# Altium PCB Multi_HUTSCHIENE_EXT_1_1.PcbDoc
Units mm, origin at the board's own origin, x right, y up, seen from the top; angles counter-clockwise.
Board outline 41.5 x 56.74 mm, 2 copper layers (Top Layer, Bottom Layer); 28 components, 23 nets, 95 pads, 21 vias.
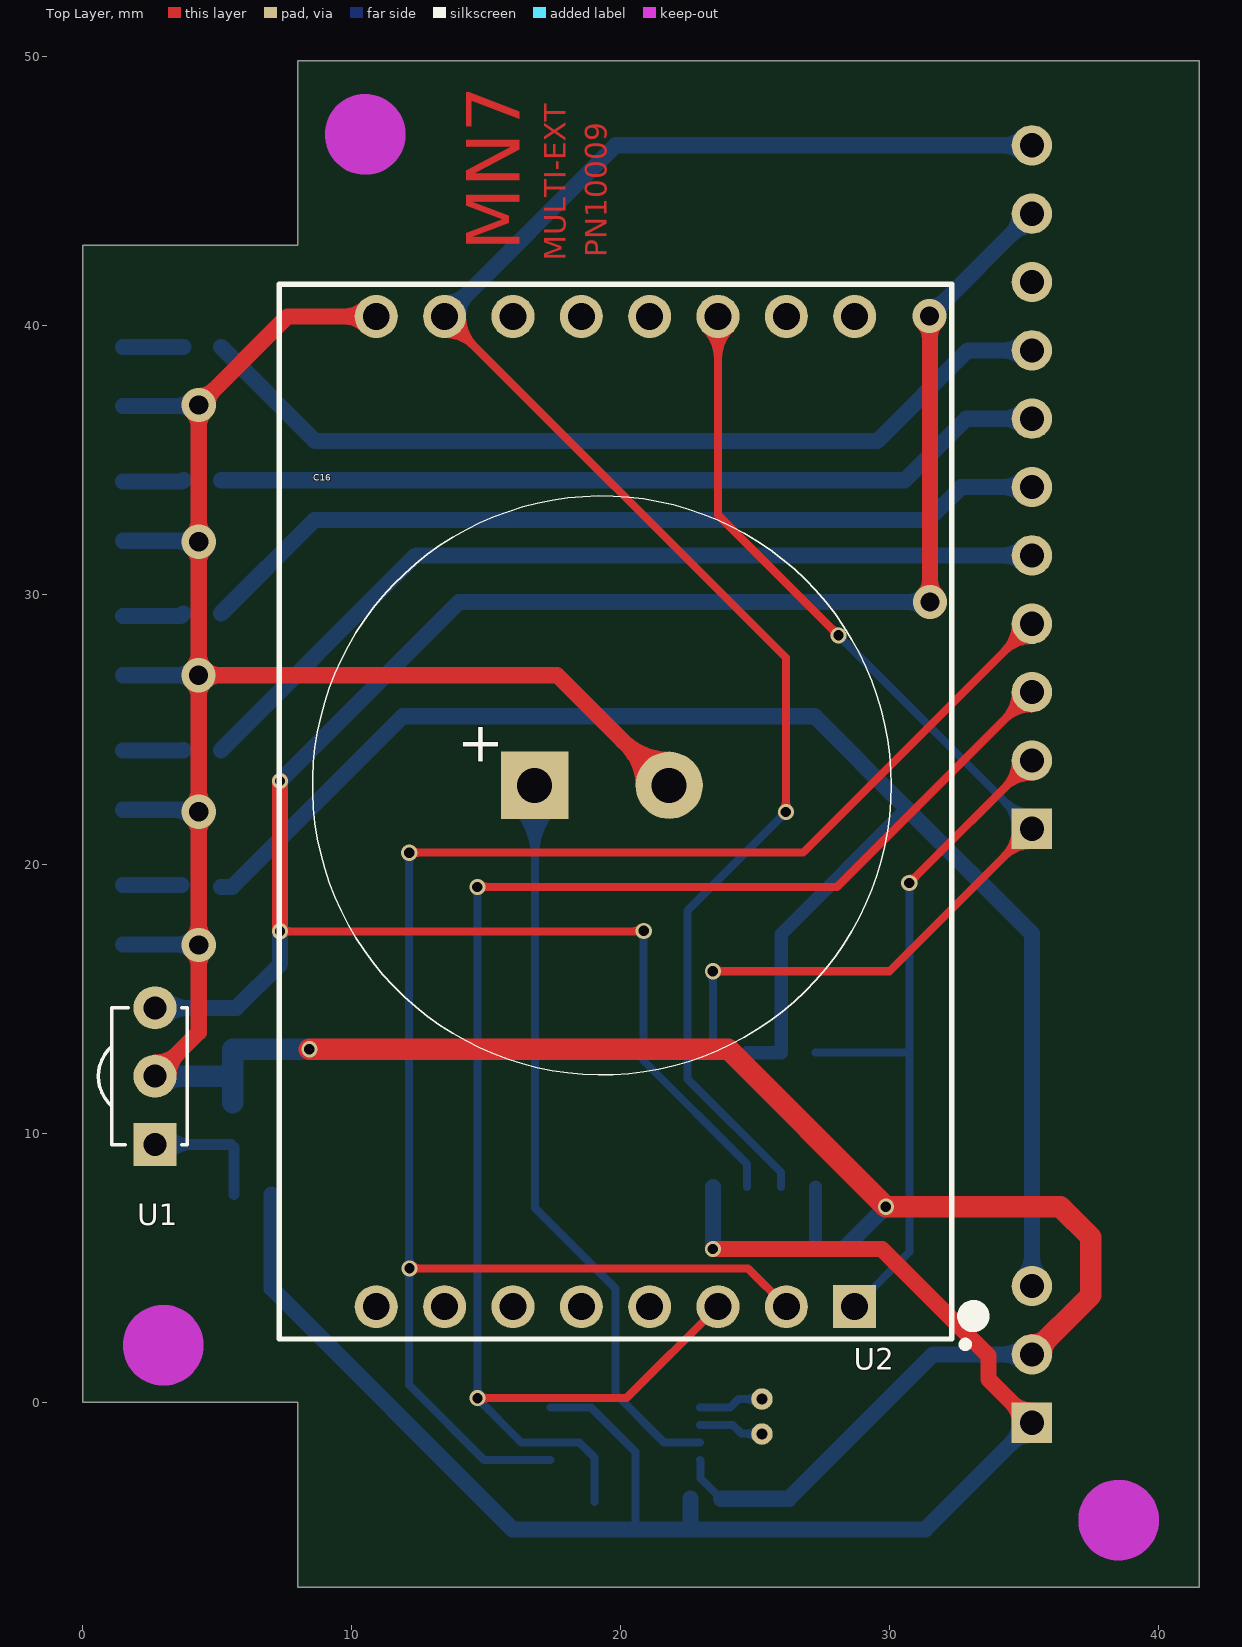
[diagram p0: Top Layer view]
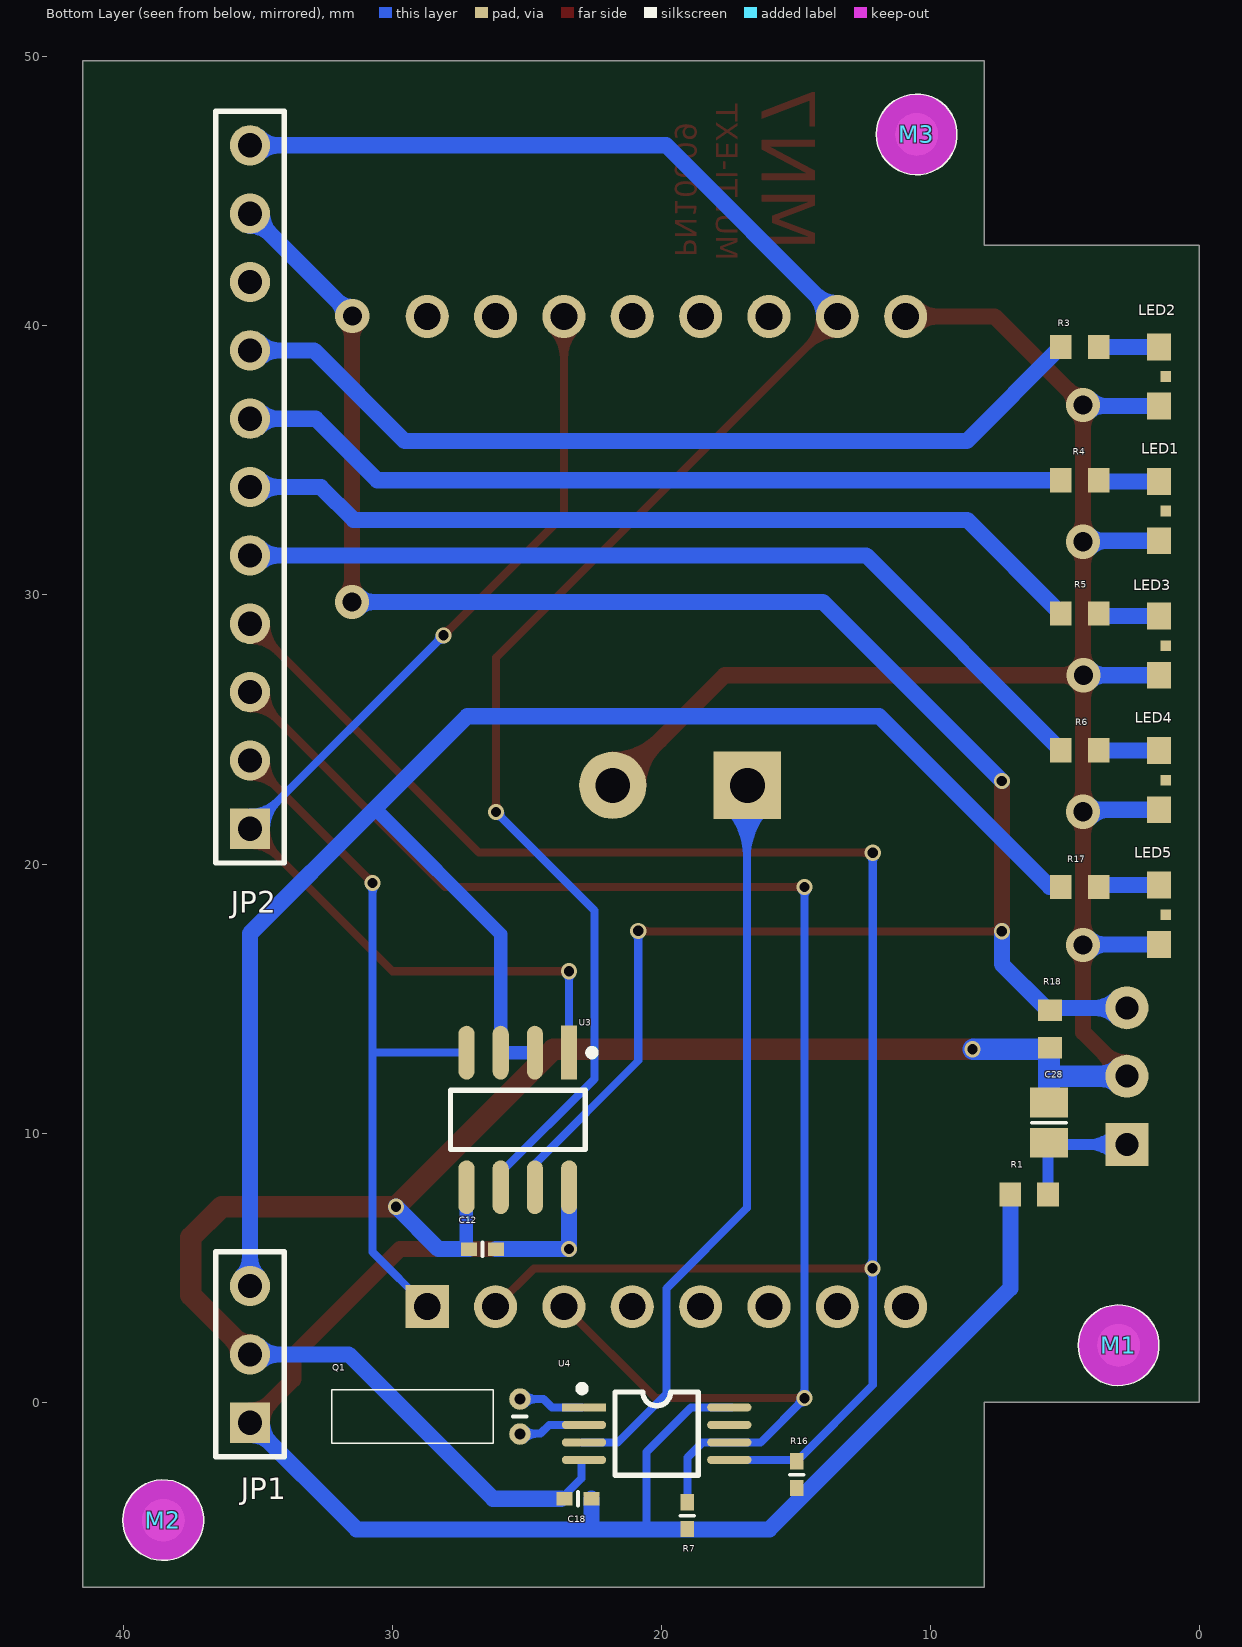
[diagram p1: Bottom Layer view, seen from below]

## Layer stack, top to bottom
Top Solder: solder mask 0.0102, Solder Resist, Dk 3.5
Top Layer: signal copper 0.0356
Dielectric 1: dielectric 0.32, FR-4, Dk 4.8
Bottom Layer: signal copper 0.0356
Bottom Solder: solder mask 0.0102, Solder Resist, Dk 3.5

## Board outline
0,0 0,43.002 8.001,43.002 8.001,49.86 41.504,49.86 41.504,-6.883 8.001,-6.883 8.001,0

## Design rules (kind name [scope] priority, off if disabled: settings)
Clearance [All] p1: gap=0.254
ComponentClearance ComponentClearance_1 [(HasFootprint('KIMaip') AND HasFootprint('Goldcap_B'))] p1: gap=0 collisioncheckmode=3 verticalgap=0 showdistances=FALSE
ComponentClearance [All] p2: gap=0 collisioncheckmode=3 verticalgap=0 showdistances=FALSE
MinimumSolderMaskSliver [All] p1: minsoldermaskwidth=0.127
PolygonConnect [All] p1: connectstyle=Relief reliefconductorwidth=0.254 reliefentries=4 polygonreliefangle="90 Angle" airgapwidth=0.254
RoomDefinition Multi_HUTSCHIENE_EXT_1_2 [InComponentClass('Multi_HUTSCHIENE_EXT_1_2')] p1: confinementstyle=ConfineIn formatcopy=TRUE lockcomponents=FALSE outline -3.025,-8.05 46.125,-8.05 46.125,51.918 -3.025,51.918
RoomDefinition Multi_HUTSCHIENE_EXT_1_1 [InComponentClass('Multi_HUTSCHIENE_EXT_1_1')] p2: confinementstyle=ConfineIn formatcopy=TRUE lockcomponents=FALSE outline -3.575,-8.05 44.275,-8.05 44.275,51.156 -3.575,51.156
RoutingVias [All] p1: holewidth=0.711 width=1.27 viastyle="Through Hole" minholewidth=0.25 minwidth=0.5 maxholewidth=0.711 maxwidth=1.27
SilkToBoardRegionClearance [(HasFootprint('Mark-3mm') AND IsEmbeddedBoard)] p1:
SilkToSilkClearance [All] p1: silktosilkclearance=0.2
SilkToSolderMaskClearance [IsPad] p1: minsilkscreentomaskgap=0.1 clearancetoexposedcopper=TRUE
SolderMaskExpansion [All] p1: expansion=0.102
UnpouredPolygon [All] p1: allowunpoured=FALSE
Width [All] p1: maxlimit=1 minlimit=0.254 preferedwidth=0.6
24 further rules are at their usual default settings.

## Classes and differential pairs
component class Multi_HUTSCHIENE_EXT_1_1: C28 JP1 JP2 LED1 LED2 LED3 LED4 LED5 M1 M2 M3 R1 R3 R4 R5 R6 R17 U1
component class Multi_HUTSCHIENE_EXT_1_2: C12 C16 C18 Q1 R7 R16 R18 U2 U3 U4

## Components (designator, comment, footprint, x,y, rotation, side; value= is the part's Value field where it differs from the comment)
C12 "100nF25V_0402" C0402 26.637,5.69 r0 bottom
C16 "1F5_5V5_POL" Goldcap_B 19.3,22.925 r0 top
C18 "100nF25V_0402" C0402 23.089,-3.581 r0 bottom
C28 "47u6V3_0805" C0805 5.588,10.389 r90 bottom
JP1 "Plug_3_90_2.54" HDR1X3-DOWN 35.281,1.778 r90 bottom
JP2 "Plug_11_90_2.54" HDR1X11_2.54-DOWN 35.281,34.011 r90 bottom
LED1 "HSMG-120-Y" HSMA-120-OR 1.5,33.117 r270 bottom
LED2 "HSMG-120-GR" HSMA-120-G 1.5,38.117 r270 bottom
LED3 "HSMG-120-Y" HSMA-120-OR 1.5,28.117 r270 bottom
LED4 "HSMG-120-Y" HSMA-120-OR 1.5,23.117 r270 bottom
LED5 "HSMG-120-Y" HSMA-120-OR 1.5,18.117 r270 bottom
M1 "Mark" Mark-3mm 3,2.117 r180 bottom
M2 "Mark" Mark-3mm 38.504,-4.383 r180 bottom
M3 "Mark" Mark-3mm 10.504,47.117 r180 bottom
Q1 "Crystal_32k768Hz" VT-200 25.248,-0.533 r180 bottom
R1 "47R_0603" R0603(1608) 6.325,7.722 r0 bottom
R3 "82R_0603" R0603(1608) 4.445,39.218 r0 bottom
R4 "82R_0603" R0603(1608) 4.445,34.265 r0 bottom
R5 "82R_0603" R0603(1608) 4.445,29.312 r0 bottom
R6 "82R_0603" R0603(1608) 4.445,24.232 r0 bottom
R7 "4k7_0402" R0402 19.025,-4.216 r90 bottom
R16 "4k7_0402" R0402 14.961,-2.692 r90 bottom
R17 "82R_0603" R0603(1608) 4.445,19.152 r0 bottom
R18 "0R_0603" R0603(1608) 5.554,13.867 r270 bottom
U1 "GP1UX301QS" IR-GP 2.692,12.117 r270 top
U2 "KIMaip" KIMaip 19.805,21.95 r90 top
U3 "ADM3483ARZ" SOIC8_N 25.329,10.492 r0 bottom
U4 "DS1339U-33" uSOP8 20.168,-1.168 r270 bottom

## Footprints (in the part's own frame and the unit in brackets; to place one, negate y for a bottom-side part, rotate by r counter-clockwise, add the part's x,y. Pads: shape width x height; smd on the part's side, far side on the other; paste and mask are expansions set on the pad)
C0402 [mm] "Chip Capacitor, Body 1.0x0.5mm, IPC High Density"
  rect 0.6x0.5 smd: 1(-0.5,0) 2(0.5,0)
  silkscreen extent 0,-0.25 0,0.25, body extent -0.55,-0.3 0.55,0.3, height 0.5
C0805 [mm] "Chip Capacitor, Body 2.0x1.3mm, IPC High Density"
  rect 1.1x1.4 smd: 1(-0.75,0) 2(0.75,0)
  silkscreen extent 0,-0.64 0,0.64, body extent -1.1,-0.72 1.1,0.72, height 1.4
Goldcap_B [mm] "Capacitor, Body 21.5x9.5mm, IPC High Density"
  rect 2.5x2.5 hole 1.3: 1(-2.5,0)
  round 2.5 hole 1.3: 2(2.5,0)
  silkscreen extent -10.75,-10.76 10.76,10.76, body extent -10.67,-10.73 10.75,10.73, height 8
HDR1X3-DOWN [mm] "Connector; Header; 3 Position"
  rect 1.5x1.5 hole 0.9: 1(-2.54,0)
  round 1.5 hole 0.9: 2(0,0) 3(2.54,0)
  silkscreen extent -3.81,-1.27 3.81,1.27, body extent -3.81,-0.31 3.81,10.05, height 2.57
HDR1X11_2.54-DOWN [mm] "Connector; Header; 11 Position"
  rect 1.5x1.5 hole 0.9: 1(-12.7,0)
  round 1.5 hole 0.9: 2(-10.16,0) 3(-7.62,0) 4(-5.08,0) 5(-2.54,0) 6(0,0) 7(2.54,0) 8(5.08,0) 9(7.62,0) 10(10.16,0) 11(12.7,0)
  silkscreen extent -13.97,-1.27 13.97,1.27, body extent -13.97,-0.33 13.96,10.04, height 2.57
HSMA-120-G [mm] "GREEN"
  rect 1x0.9 smd: 1(1.1,0) 2(-1.1,0)
  rect 0.4x0.4 smd: 3(0,0.25)
  body extent -0.8,-0.2 0.8,0.85, height 0.6
HSMA-120-OR [mm] "OR"
  rect 1x0.9 smd: 1(1.1,0) 2(-1.1,0)
  rect 0.4x0.4 smd: 3(0,0.25)
  body extent -0.8,-0.2 0.8,0.85, height 0.6
IR-GP [mm]
  rect 1.6x1.6 hole 0.85: 1(2.54,0)
  round 1.6 hole 0.85: 2(0,0) 3(-2.54,0)
  silkscreen extent -2.55,-2.11 2.55,1.2, body extent -2.54,-1.6 2.54,1.2, height 8
KIMaip [mm]
  rect 1.6x1.6 hole 1: 1(-18.4,-8.89)
  round 1.6 hole 1: 2(-18.4,-6.35) 3(-18.4,-3.81) 4(-18.4,-1.27) 5(-18.4,1.27) 6(-18.4,3.81) 7(-18.4,6.35) 8(-18.4,8.89) 9(18.4,8.89) 10(18.4,6.35) 11(18.4,3.81) 12(18.4,1.27) 13(18.4,-1.27) 14(18.4,-3.81) 15(18.4,-6.35) 16(18.4,-8.89)
  silkscreen extent -19.92,-13.6 19.6,12.5, body extent -19.6,-12.55 19.6,12.55, height 8.5
Mark-3mm [mm]
  round 1.6 smd paste-2: 0(0,0)
  Keep-Out Layer circle w2: c0,0 r0.5
  silkscreen extent -1.5,-1.5 1.5,1.5
R0402 [mm] "Chip Resistor, Body 1.0x0.5mm"
  rect 0.6x0.5 smd: 1(-0.5,0) 2(0.5,0)
  silkscreen extent 0,-0.25 0,0.25, body extent -0.55,-0.3 0.55,0.3, height 0.55
R0603(1608) [mm] "Chip Resistor, 0603"
  rect 0.8x0.9 smd: 1(-0.7,0) 2(0.7,0)
  body extent -0.87,-0.48 0.87,0.48, height 0.6
SOIC8_N [mm] "SOIC, 8-Leads, Body 4.9x3.9mm, Pitch 1.27mm, IPC Medium Density"
  rect 0.6x2 smd: 1(-1.905,-2.5)
  oval 0.6x2 smd: 2(-0.635,-2.5) 3(0.635,-2.5) 4(1.905,-2.5) 5(1.905,2.5) 6(0.635,2.5) 7(-0.635,2.5) 8(-1.905,2.5)
  silkscreen extent -2.88,-2.62 2.5,1.1, body extent -2.5,-2 2.5,2, height 1.75
uSOP8 [mm] "Shrink Small Outline, Plastic, Thin; 8 Leads; Body Width 4.4 mm; Pitch 0.65 mm"
  rect 0.3x1.65 smd: 1(-0.975,-2.7)
  oval 0.3x1.65 smd: 2(-0.325,-2.7) 3(0.325,-2.7) 4(0.975,-2.7) 5(0.975,2.7) 6(0.325,2.7) 7(-0.325,2.7) 8(-0.975,2.7)
  silkscreen extent -1.8,-2.9 1.55,1.55, body extent -1.52,-1.52 1.52,1.52, height 1
VT-200 [mm] "Crystal, 32.768kHz"
  round 0.8 hole 0.4: 1(0,0.65) 2(0,-0.65)
  silkscreen extent -7,-1 0.25,1, body extent -6.98,-0.97 -0.98,1.02, height 2.09

## Part data
C12 C18: "AVX, X5R, 10%, 25V"
C16: "Panasonic, F series"
C28: "Kemet  C series, X5R, 20%, 6.3V"
JP1: "Plug,-3-Pin"
JP2: "Plug, 11-Pin"
LED1 LED3 LED4 LED5: "LED, 90°, yellow"
LED2: "LED, 90°, green"
Q1: "Crystal, 32.768kHz"
R1 R3 R4 R5 R6 R17: "Vishay, CRCW series, 100mW, 1%"
R7 R16: "Vishay CRCW series, 63mW, 1%"
R18: "Vishay, CRCW series, 100mW"
U1: "IR reseiver"
U2: "PoE, 12V"
U3: "Transceiver, RS485/422"
U4: "RTC"

## Via types
v1: diameter 0.6, hole 0.381, Top Layer to Bottom Layer, 14 vias
v2: diameter 1.27, hole 0.711, Top Layer to Bottom Layer, 7 vias

## Nets (pads, with @x,y where several pads share a name; then routed paths per layer and width w, separated by ;. In a path a pad name is that pad's centre, name@x,y a point inside that pad or via, vN(x,y) a via of type N, cw(c..) or ccw(c..) an arc to the next point about the centre after c; other vN are vias at no path point)
GND_EXT: C12.2 C16.2 C18.2 C28.2 JP1.2 LED1.1 LED2.1 LED3.1 LED4.1 LED5.1 R18.2 U1.2 U2.9 U3.5 U4.4 | length 165.3
  Top Layer w0.6: U1.2 4.318,13.743 v2(4.318,16.993) v2(4.318,21.946) v2@4.318,27.017 ; U1.2@2.692,12.617 ccw(c2.692,13.824) 3.546,12.97 ccw(c4.399,12.117) U1.2@3.192,12.117 ; v2@4.072,26.78 cw(c3.479,26.186) 4.318,26.186 ; v2@4.072,27.253 ccw(c3.479,27.847) 4.318,27.847 ; v2@4.081,16.756 cw(c3.509,16.184) 4.318,16.184 cw(c5.127,16.184) v2@4.555,16.756 ; v2@4.081,17.229 ccw(c3.509,17.801) 4.318,17.801 ccw(c5.127,17.801) v2@4.555,17.229 ; v2@4.081,21.709 cw(c3.509,21.137) 4.318,21.137 cw(c5.127,21.137) v2@4.555,21.709 ; v2@4.081,22.182 ccw(c3.509,22.754) 4.318,22.754 ccw(c5.127,22.754) v2@4.555,22.182 ; v2@4.081,31.742 cw(c3.509,31.17) 4.318,31.17 cw(c5.127,31.17) v2@4.555,31.742 ; v2@4.081,32.215 ccw(c3.509,32.787) 4.318,32.787 ccw(c5.127,32.787) v2@4.555,32.215 ; v2@4.081,36.822 cw(c3.509,36.25) 4.318,36.25 cw(c5.127,36.25) v2@4.555,36.822 ; 4.318,26.23 cw(c5.096,26.23) 4.546,26.78 cw(c5.118,26.208) 5.118,27.017 cw(c5.118,27.825) 4.546,27.253 cw(c5.096,27.804) 4.318,27.804 ; v2@4.318,37.394 ccw(c4.318,38.202) 4.89,37.63 ccw(c5.462,37.059) v2@4.653,37.059 ; U2.9@10.561,39.996 ccw(c9.708,39.143) 9.708,40.35 ccw(c9.708,41.557) U2.9@10.561,40.704 ; U2.9 7.609,40.35 v2(4.318,37.059) v2(4.318,31.979) v2@4.318,27.017 ; 20.056,24.598 ccw(c21.8,26.342) C16.2@21.8,23.875 ; 20.229,24.424 cw(c18.73,22.925) C16.2@20.85,22.925 ; C16.2@21.764,22.889 17.637,27.017 v2@4.318,27.017
  Top Layer w0.8: v1(8.429,13.117) 24.004,13.117 v1(29.854,7.267) 36.333,7.267 37.475,6.125 37.475,3.972 JP1.2 ; JP1.2@35.281,2.128 ccw(c35.281,2.973) 35.878,2.375 ccw(c36.476,1.778) JP1.2@35.631,1.778
  Bottom Layer w0.3: U4.4@22.943,-2.143 22.962,-2.162 22.962,-2.827 C18.2@23.724,-3.589
  Bottom Layer w0.5: C12.2@27.239,5.69 U3.5@27.239,7.995
  Bottom Layer w0.6: LED5.1 4.294,17.017 v2(4.318,16.993) ; LED4.1 4.247,22.017 v2(4.318,21.946) ; LED3.1 v2(4.309,27.017) ; LED1.1 4.28,32.017 v2(4.318,31.979) ; LED2.1 4.276,37.017 v2(4.318,37.059) ; 3.338,22.017 cw(c3.338,20.965) v2@4.081,21.709 ; 3.408,37.017 ccw(c3.408,37.969) v2@4.081,37.295 ; 3.418,32.017 cw(c3.418,31.078) v2@4.081,31.742 ; 3.451,17.017 cw(c3.451,16.126) v2@4.081,16.756 ; 3.567,17.017 ccw(c3.567,17.743) v2@4.081,17.229 ; 3.601,32.017 ccw(c3.601,32.696) v2@4.081,32.215 ; 3.611,37.017 cw(c3.611,36.351) v2@4.081,36.822 ; 3.681,22.017 ccw(c3.681,22.583) v2@4.081,22.182 ; v2@4.072,26.78 ccw(c3.5,26.208) 3.5,27.017 ccw(c3.5,27.825) v2@4.072,27.253 ; C18.2@23.724,-3.589 26.248,-3.589 31.615,1.778 JP1.2 ; C12.2 27.239,5.69 28.277,5.69 v1(29.854,7.267) ; JP1.2@34.963,1.459 ccw(c34.195,0.691) 34.195,1.778 ccw(c34.195,2.864) JP1.2@34.963,2.096
  Bottom Layer w0.8: U1.2 5.588,12.117 ; U1.2@2.975,11.834 cw(c3.658,11.151) 3.658,12.117 cw(c3.658,13.082) U1.2@2.975,12.399 ; C28.2 5.588,12.117 ; v1@8.404,13.118 5.588,13.118 5.588,12.117
NetC12_1: C12.1 C18.1 JP1.1 R1.2 R7.1 R16.1 U3.8 U4.8 | length 71.8
  Top Layer w0.6: v1@23.424,5.69 29.71,5.69 33.668,1.732 33.668,0.851 JP1.1 ; 34.513,0.006 cw(c33.745,-0.762) 34.831,-0.762 ccw(c33.745,-0.762) 34.513,0.006 ; 34.513,0.006 ccw(c35.281,0.774) 35.281,-0.312 cw(c35.281,0.774) 34.513,0.006
  Bottom Layer w0.3: U4.8@17.393,-0.193 U4.8 18.889,-0.193 20.549,-1.853 20.549,-4.724
  Bottom Layer w0.6: R1.2 7.025,4.228 15.977,-4.724 20.549,-4.724 22.581,-4.724 ; C18.1 22.589,-4.716 22.581,-4.724 ; v1(23.424,5.692) 24.738,5.692 24.74,5.69 C12.1 ; v1@23.424,5.737 U3.8 ; JP1.1 31.319,-4.724 22.581,-4.724 ; 34.513,-1.531 cw(c35.281,-2.299) 35.281,-1.212 ccw(c35.281,-2.299) 34.513,-1.531 ; 34.513,-1.531 ccw(c33.745,-0.762) 34.831,-0.762 cw(c33.745,-0.762) 34.513,-1.531
NetC16_1: C16.1 U4.3 | length 35.8
  Bottom Layer w0.3: C16.1@16.022,22.147 cw(c14.099,20.224) 16.819,20.224 ; C16.1@16.234,22.359 cw(c14.824,20.949) 16.819,20.949 ; C16.1@16.446,22.571 cw(c15.548,21.673) 16.819,21.673 ; 16.819,20.314 cw(c19.411,20.314) C16.1@17.578,22.147 ; 16.819,21.039 cw(c18.686,21.039) C16.1@17.366,22.359 ; C16.1@16.819,22.835 16.819,7.217 19.804,4.232 19.804,0.317 21.614,-1.493 U4.3 U4.3@22.943,-1.493
NetC28_1: C28.1 R1.1 U1.1 | length 6.9
  Bottom Layer w0.4: U1.1 C28.1@5.526,9.577 ; U1.1@3.116,9.152 cw(c4.141,8.128) 4.141,9.577 cw(c4.141,11.025) U1.1@3.116,10.001 ; R1.1 C28.1@5.625,9.478
NetJP1_3: JP1.3 R17.2 U3.2 U3.3 | length 63.2
  Bottom Layer w0.3: 35.281,10.792 35.304,10.792
  Bottom Layer w0.5: U3.2 U3.3 25.964,17.389 30.637,22.063
  Bottom Layer w0.6: R17.2 5.563,19.152 11.903,25.492 27.208,25.492 30.637,22.063 35.281,17.419 35.281,10.792 JP1.3 ; JP1.3@34.963,4.636 ccw(c34.195,5.404) 35.281,5.404 ccw(c36.367,5.404) JP1.3@35.599,4.636
NetJP2_1: JP2.1 U2.14 U3.1 | length 51.5
  Top Layer w0.3: U2.14@23.155,39.89 cw(c22.046,38.781) 23.615,38.781 cw(c25.184,38.781) U2.14@24.075,39.89 ; U2.14@23.368,40.103 cw(c22.77,39.505) 23.615,39.505 cw(c24.46,39.505) U2.14@23.862,40.103 ; v1@23.53,15.911 cw(c23.786,15.654) 23.786,16.017 cw(c23.786,16.379) v1@23.53,16.123 ; v1@23.554,16.017 29.987,16.017 JP2.1 ; U2.14 23.615,32.976 v1(28.091,28.5) ; v1@27.941,28.5 ccw(c27.579,28.5) 27.835,28.756 ccw(c28.091,29.012) v1@28.091,28.65 ; JP2.1@34.681,21.311 cw(c33.232,21.311) 34.256,20.286 cw(c35.281,19.262) JP2.1@35.281,20.711
  Bottom Layer w0.3: v1@23.318,15.911 cw(c23.061,15.654) 23.424,15.654 cw(c23.786,15.654) v1@23.53,15.911 ; U3.1 v1(23.424,16.017) ; v1@28.075,28.5 v1(28.091,28.5) JP2.1 ; v1@28.091,28.35 cw(c28.091,27.988) 28.347,28.244 cw(c28.603,28.5) v1@28.241,28.5 ; JP2.1@34.681,21.311 ccw(c33.232,21.311) 34.256,22.335 ccw(c35.281,23.359) JP2.1@35.281,21.911
NetJP2_2: JP2.2 U2.1 U3.4 | length 30
  Top Layer w0.3: v1(30.725,19.3) JP2.2 ; v1@30.725,19.45 ccw(c30.725,19.812) 30.981,19.556 ccw(c31.237,19.3) v1@30.875,19.3 ; JP2.2@34.681,23.851 cw(c33.232,23.851) 34.256,22.826 cw(c35.281,21.802) JP2.2@35.281,23.251
  Bottom Layer w0.3: U3.4 30.667,12.992 30.725,13.05 ; U2.1 30.725,5.58 30.725,13.05 ; v1@30.619,19.194 cw(c30.363,18.938) 30.725,18.938 cw(c31.087,18.938) v1@30.831,19.194 ; v1(30.725,19.3) 30.725,13.05
NetJP2_3: JP2.3 R7.2 U2.3 U4.6 | length 65
  Top Layer w0.3: v1(14.671,19.152) 28.042,19.152 JP2.3 ; v1(14.675,0.15) 20.215,0.15 U2.3 ; v1@14.777,19.046 cw(c15.033,18.789) 15.033,19.152 cw(c15.033,19.514) v1@14.777,19.258 ; v1@14.781,0.044 cw(c15.037,-0.212) 15.037,0.15 cw(c15.037,0.512) v1@14.781,0.256 ; JP2.3@34.681,26.391 cw(c33.232,26.391) 34.256,25.366 cw(c35.281,24.342) JP2.3@35.281,25.791
  Bottom Layer w0.3: v1@14.565,19.046 cw(c14.309,18.789) 14.671,18.789 cw(c15.033,18.789) v1@14.777,19.046 ; v1@14.569,0.256 ccw(c14.323,0.502) 14.671,0.502 ; 14.671,0.522 ccw(c15.047,0.522) v1@14.781,0.256 ; v1(14.671,19.152) 14.671,0.137 16.302,-1.493 U4.6 18.461,-1.493 19.025,-2.057 R7.2 ; v1@14.675,0 cw(c14.675,-0.322) 14.902,-0.094 ; v1@14.825,0.15 ccw(c15.228,0.15) 14.943,-0.135
NetJP2_4: JP2.4 R16.2 U2.2 U4.5 | length 72.6
  Top Layer w0.3: v1(12.138,20.422) 26.772,20.422 JP2.4 ; v1(12.15,4.975) 24.73,4.975 U2.2 ; v1@12.244,20.316 cw(c12.499,20.061) 12.499,20.422 ; v1@12.244,20.528 ccw(c12.501,20.785) 12.501,20.422 ; v1@12.256,4.869 cw(c12.512,4.613) 12.512,4.975 cw(c12.512,5.337) v1@12.256,5.081 ; JP2.4@34.681,28.931 cw(c33.232,28.931) 34.256,27.906 cw(c35.281,26.882) JP2.4@35.281,28.331
  Bottom Layer w0.3: v1@12.032,20.316 cw(c11.776,20.06) 12.138,20.06 cw(c12.5,20.06) v1@12.244,20.316 ; v1@12.044,4.869 cw(c11.817,4.642) 12.138,4.642 ; v1@12.044,5.081 ccw(c11.817,5.308) 12.138,5.308 ; 12.138,4.584 cw(c12.541,4.584) v1@12.256,4.869 ; 12.138,5.366 ccw(c12.541,5.366) v1@12.256,5.081 ; v1@12.138,20.4 12.138,0.638 14.92,-2.143 U4.5@17.393,-2.143
NetJP2_5: JP2.5 R6.2 | length 34.8
  Bottom Layer w0.6: R6.2 12.384,31.471 JP2.5 ; JP2.5@34.962,31.152 ccw(c34.194,30.384) 34.194,31.471 ccw(c34.194,32.557) JP2.5@34.962,31.789
NetJP2_6: JP2.6 R5.2 | length 33.8
  Bottom Layer w0.6: R5.2 8.625,32.792 31.429,32.792 32.648,34.011 JP2.6 ; JP2.6@34.962,33.692 ccw(c34.194,32.924) 34.194,34.011 ccw(c34.194,35.097) JP2.6@34.962,34.329
NetJP2_7: JP2.7 R4.2 | length 32.8
  Bottom Layer w0.6: R4.2 30.552,34.265 32.838,36.551 JP2.7 ; JP2.7@34.962,36.232 ccw(c34.194,35.464) 34.194,36.551 ccw(c34.194,37.637) JP2.7@34.962,36.869
NetJP2_8: JP2.8 R3.2 | length 34.7
  Bottom Layer w0.6: R3.2 8.646,35.717 29.529,35.717 32.903,39.091 JP2.8 ; JP2.8@34.962,38.772 ccw(c34.194,38.004) 34.194,39.091 ccw(c34.194,40.177) JP2.8@34.962,39.409
NetJP2_9: JP2.9
NetJP2_10: JP2.10 R18.1 U1.3 U3.7 | length 89.9
  Top Layer w0.3: v1(7.341,17.501) v1@20.854,17.501 ; v1@7.447,17.395 cw(c7.703,17.138) 7.703,17.501 cw(c7.703,17.863) v1@7.447,17.607 ; 20.453,17.501 ccw(c20.453,17.917) v1@20.748,17.623 ; 20.53,17.501 cw(c20.53,17.193) v1@20.748,17.411
  Top Layer w0.6: v1(7.341,17.501) v1(7.341,23.089) ; v2@31.242,40.131 cw(c30.628,39.517) 31.496,39.517 ; v2@31.259,29.978 ccw(c30.686,30.551) 31.496,30.551 ; v2(31.496,29.742) v2@31.496,40.368 ; 31.496,30.549 ccw(c32.303,30.549) v2@31.732,29.978 ; 31.496,39.601 cw(c32.245,39.601) v2@31.715,40.131
  Bottom Layer w0.3: v1@20.748,17.411 cw(c20.491,17.154) 20.854,17.154 cw(c21.216,17.154) v1@20.96,17.411 ; v1(20.854,17.517) 20.854,12.692 24.694,8.852 U3.7
  Bottom Layer w0.6: U1.3 5.719,14.657 7.341,16.279 v1(7.341,17.501) ; U1.3@3.046,14.303 cw(c3.899,13.449) 3.899,14.657 cw(c3.899,15.864) U1.3@3.046,15.01 ; v1(7.341,23.089) 13.994,29.742 v2@31.346,29.742 ; v2@31.259,29.505 ccw(c30.687,28.933) 30.687,29.742 ccw(c30.687,30.55) v2@31.259,29.978 ; v2(31.479,40.368) JP2.10 ; v2@31.479,40.703 ccw(c31.479,41.512) 32.05,40.94 ccw(c32.622,40.368) v2@31.814,40.368 ; 34.512,43.402 ccw(c33.743,44.171) JP2.10@34.831,44.171 ; 34.513,43.403 cw(c35.281,42.635) JP2.10@35.281,43.721
NetJP2_11: JP2.11 U2.10 U3.6 | length 73.6
  Top Layer w0.3: U2.10@13.455,39.7 cw(c13.455,38.131) 14.565,39.24 cw(c15.674,40.35) U2.10@14.105,40.35 ; U2.10@13.455,40 cw(c13.455,39.155) 14.052,39.753 cw(c14.65,40.35) U2.10@13.805,40.35 ; U2.10 26.137,27.668 v1(26.137,21.934) ; v1@26.031,22.04 ccw(c25.774,22.296) 26.137,22.296 ccw(c26.499,22.296) v1@26.243,22.04
  Bottom Layer w0.3: U3.6 25.964,8.532 22.479,12.017 22.479,18.276 v1(26.137,21.934) ; v1@25.987,21.934 cw(c25.624,21.934) 25.881,21.678 cw(c26.137,21.421) v1@26.137,21.784
  Bottom Layer w0.6: U2.10 19.816,46.711 JP2.11 ; U2.10@13.455,40.85 ccw(c13.455,42.057) 14.309,41.204 ccw(c15.162,40.35) U2.10@13.955,40.35 ; JP2.11@34.962,46.392 ccw(c34.194,45.624) 34.194,46.711 ccw(c34.194,47.797) JP2.11@34.962,47.029
NetLED1_2: LED1.2 R4.1 | length 2.3
  Bottom Layer w0.6: LED1.2 3.697,34.217 R4.1
NetLED2_2: LED2.2 R3.1 | length 2.2
  Bottom Layer w0.6: LED2.2 R3.1 R3.1
NetLED3_2: LED3.2 R5.1 | length 2.3
  Bottom Layer w0.6: LED3.2 3.65,29.217 R5.1
NetLED4_2: LED4.2 R6.1 | length 2.3
  Bottom Layer w0.6: LED4.2 3.73,24.217 R6.1
NetLED5_2: LED5.2 R17.1 | length 2.2
  Bottom Layer w0.6: LED5.2 R17.1@3.68,19.217
NetQ1_1: Q1.1 U4.1 | length 3.4
  Bottom Layer w0.3: U4.1@22.943,-0.193 24.064,-0.193 24.374,0.117 Q1.1 ; Q1.1@25.071,-0.06 ccw(c24.644,-0.487) 24.644,0.117 ccw(c24.644,0.72) Q1.1@25.071,0.293
NetQ1_2: Q1.2 U4.2 | length 3.4
  Bottom Layer w0.3: U4.2@22.943,-0.843 24.161,-0.843 24.486,-1.168 25.233,-1.168 Q1.2 ; 24.608,-1.168 cw(c24.608,-1.823) Q1.2@25.071,-1.36 ; 24.68,-1.168 ccw(c24.68,-0.616) Q1.2@25.071,-1.007
pads on no net: LED1.3 LED2.3 LED3.3 LED4.3 LED5.3 M1.0 M2.0 M3.0 U2.4 U2.5 U2.6 U2.7 U2.8 U2.11 U2.12 U2.13 U2.15 U2.16 U4.7

## Other copper
Top Layer:
  text "MN7" at 16.254,42.767 h2 r90
  text "PN10009" at 19.475,42.55 h0.8 r90
  text "MULTI-EXT" at 17.954,42.417 h0.8 r90

## Silkscreen, mask and mechanical layers (free items; w line width, h text height)
Top Solder:
  text "MN7" at 16.254,42.767 h2 r90
Mechanical 1:
  lines w0.05: 0,0 0,0
Outline:
  the board outline again, w0.254

## Dimensions
35.281,21.311 to 41.504,-6.883 on Mechanical 13

## Text inside footprints (layer, text, board x,y; h text height)
C16: Top Overlay "+" at 13.925,23.8 h1.52